# Altium PCB ESP32 PCB git.PcbDoc (part 2 of 2)
Units mil, origin at the board's own origin, x right, y up, seen from the top; angles counter-clockwise.
Board outline 2755 x 1050 mil, 4 copper layers (L1, L2, L3, L4), stack 61.583 mil thick; 64 components, 75 nets, 304 pads, 146 vias.
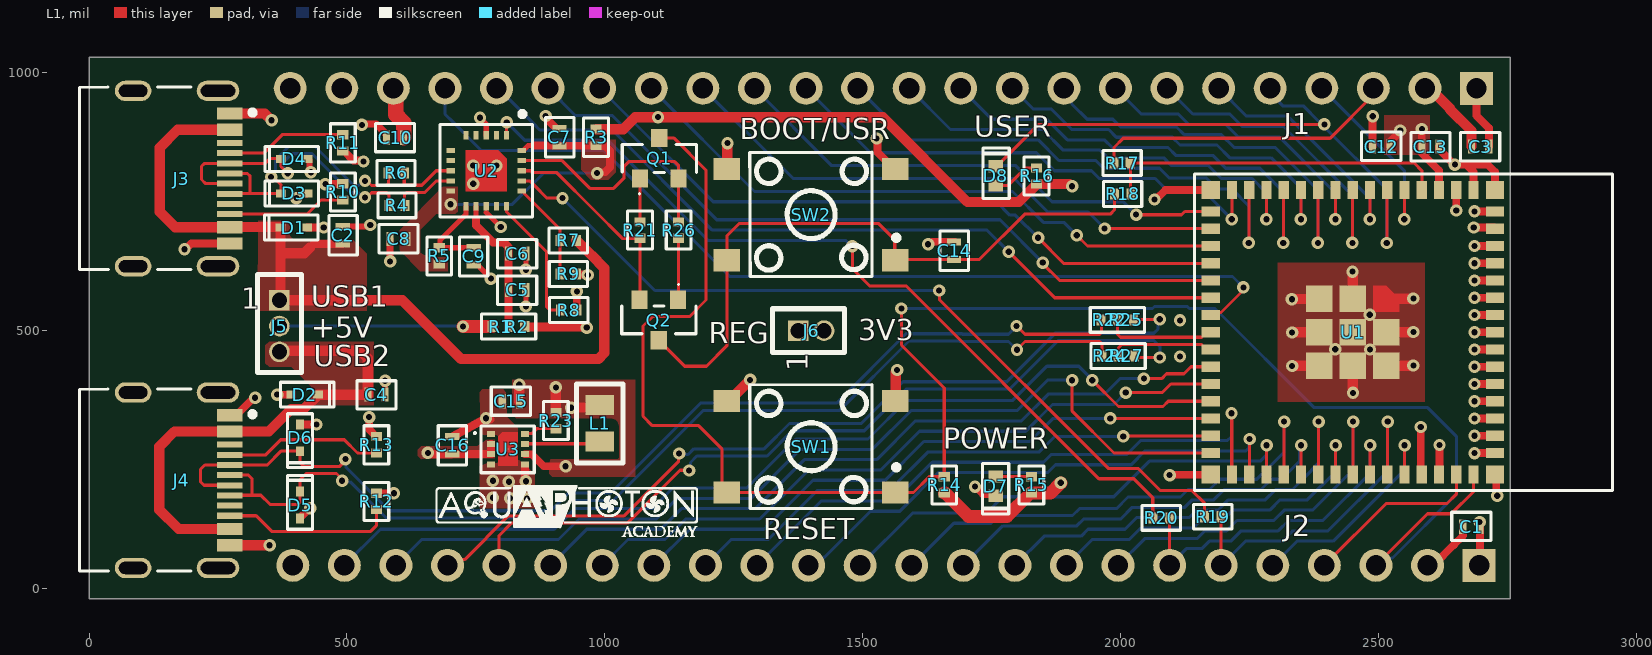
[diagram p0: L1 view]

## Via types
v1: diameter 24, hole 12, L1 to L4, tented both sides, 146 vias

## Nets (pads, with @x,y where several pads share a name; then routed paths per layer and width w, separated by ;. In a path a pad name is that pad's centre, name@x,y a point inside that pad or via, vN(x,y) a via of type N, cw(c..) or ccw(c..) an arc to the next point about the centre after c; other vN are vias at no path point) (continued)
GPIO26: (continued)
  L1 w6: v1(2010,380) 2080.73,380 2097.29,396.57 U1.26
  L4 w6: J2.18 1045,95 1116.72,95 1156.72,135 1300.15,135 1395.15,230 1535.15,230 1610.15,305 1815.78,305 1867.78,357 1987,357 v1(2010,380)
GPIO33: J2.17 U1.28 | length 1197.6
  L1 w6: v1(1980,330) 1980.18,329.82 2174.27,329.82 U1.28
  L4 w6: J2.17 1165,115 1308.43,115 1403.43,210 1543.43,210 1618.43,285 1824.06,285 1869.06,330 v1(1980,330)
GPIO34: J2.16 U1.29 | length 1083.5
  L1 w6: v1(2005,295) 2005.59,295.59 2173.86,295.59 U1.29
  L4 w6: J2.16 1245,95 1316.72,95 1411.72,190 1551.72,190 1626.72,265 1842.25,265 1872.25,295 v1(2005,295)
GPIO35: J2.15 U1.31 | length 1202.1
  L1 w6: v1(2215,340) 2215.39,339.61 2215.39,221.76 U1.31
  L4 w6: J2.15@1295,59.61 J2.15 1420,170 1560,170 1635,245 1850.53,245 1865.53,260 2012.01,260 2039.01,287 2207,287 2215,295 v1(2215,340)
GPIO36: J2.14 U1.32 | length 1034.5
  L1 w6: U1.32@2249.52,221.64 2249.63,221.74 2249.63,289.63 v1(2250,290)
  L4 w6: J2.14 1409.61,45 1425.35,60.73 1425.73,60.73 1515,150 1571.72,150 1646.72,225 1858.82,225 1873.82,240 2020.29,240 2047.29,267 2243.1,267 2248.96,272.86 2248.96,288.96 v1(2250,290)
GPIO37: J2.13 U1.33 | length 951.3
  L1 w6: U1.33 v1@2282.72,277.49
  L4 w6: J2.13 1596.64,146.64 1740.07,146.64 1771.43,178 1986.58,178 2055.58,247 2270.73,247 2282.93,259.21 v1(2282.93,277.7)
GPIO38: J2.12 U1.34 | length 973.4
  L1 w6: U1.34@2316.45,221.64 v1@2316.45,323.22
  L4 w6: J2.12 1676.64,126.64 1748.36,126.64 1763.36,141.64 1906.79,141.64 1920.15,155 1991.86,155 2014.31,177.45 2116.03,177.45 2130.58,192 2172.29,192 2192.29,212 2264.01,212 2316.93,264.92 v1(2316.93,323.7)
GPIO39: J2.11 U1.35 | length 823.7
  L1 w6: U1.35 v1@2349.65,277.49
  L4 w6: J2.11 1771.64,121.64 1915.07,121.64 1928.43,135 2000.15,135 2022.6,157.45 2124.31,157.45 2138.86,172 2180.58,172 2200.58,192 2272.29,192 2292.29,212 2312,212 2347.18,247.18 2347.18,275.03 v1(2349.86,277.7)
GPIO40: J2.10 U1.36 | length 853.4
  L1 w6: U1.36@2383.38,221.64 v1@2383.38,323.22
  L4 w6: J2.10 1851.64,101.64 1923.36,101.64 1936.72,115 1950.09,115 2008.43,115 2030.88,137.45 2132.6,137.45 2147.15,152 2188.86,152 2208.86,172 2280.58,172 2300.58,192 2333.28,192 2369.86,228.58 2369.86,229.86 2383.86,243.86 v1(2383.86,323.7)
GPIO41: J2.9 U1.37 | length 704.1
  L1 w6: U1.37 v1@2416.57,277.49
  L4 w6: J2.9 1945,95 2016.72,95 2039.17,117.45 2140.88,117.45 2155.43,132 2197.15,132 2217.15,152 2288.86,152 2308.86,172 2362,172 2416.79,226.79 v1(2416.79,277.7)
GPIO42: J2.8 U1.38 | length 727.2
  L1 w6: U1.38@2450.31,221.64 v1@2450.31,323.22
  L4 w6: J2.8 2047.45,97.45 2149.17,97.45 2163.72,112 2205.43,112 2225.43,132 2297.15,132 2317.15,152 2372,152 2450.79,230.79 v1(2450.79,323.7)
GPIO45: J2.5 U1.41 | length 435.7
  L1 w6: U1.41 v1@2550.43,277.49
  L4 w6: J2.5 2342,92 2412,92 2550.65,230.65 v1(2550.65,277.7)
GPIO46: J2.4 U1.44 | length 351.3
  L1 w6: J2.4 2515,165 2632.72,165 2650.83,183.11 U1.44
GPIO47: J2.23 U1.27 | length 1876.4
  L1 w6: v1(1945,404) 1996,353 2082.01,353 2092.11,363.1 U1.27
  L4 w6: J2.23 565,115 901.72,115 941.72,155 1091.86,155 1131.86,195 1275.29,195 1370.29,290 1510.29,290 1585.29,365 1790.93,365 1856.93,431 1919,431 1945,405 v1(1945,404)
GPIO48: J2.22 U1.30 | length 1821.8
  L1 w6: v1(1906,404) 1906,344 1987.29,262.71 U1.30
  L4 w6: J2.22 645,95 910,95 950,135 1100.15,135 1140.15,175 1283.58,175 1378.58,270 1518.58,270 1593.58,345 1799.21,345 1858.21,404 v1(1906,404)
NetC9_2: C9.2 R5.2 U2.11 | length 168.7
  L1 w10.01: U2.11@730.63,741.1 730.63,725.63 722,717 680.4,675.4 680.4,662.15 R5.2 C9.2
NetD7_2: D7.2 R15.1 | length 69.3
  L1 w6: D7.2 1758.33,217.07 1826.67,217.07 R15.1
NetD8_2: D8.2 R16.1 | length 93.3
  L1 w6: D8.2 1781.3,781.3 1815.75,815.75 R16.1
NetJ3_A5: J3.A5 R11.2 | length 234.2
  L1 w6: J3.A5 338.49,844.13 374.35,880 R11.2
NetJ3_B5: J3.B5 R10.2 | length 230.6
  L1 w6: J3.B5 422.56,726.02 449.79,753.25 R10.2
NetJ4_A5: J4.A5 R13.2 | length 307
  L1 w6: J4.A5 342.5,259.29 371.67,288.46 494.89,288.46 520.36,263 R13.2
NetJ4_B5: J4.B5 R12.2 | length 332.7
  L1 w6: J4.B5 323.82,141.18 354,111 546,111 557,122 R12.2
NetL1_1: L1.1 U3.7 | length 158.6
  L1 w6: U3.7@845.53,280.84 872,280.84 L1.1@1004.16,280.84
NetQ1_1: Q1.1 R21.1 | length 84.3
  L1 w6: R21.1 1068,794.8 Q1.1
NetQ2_1: Q2.1 R26.1 | length 119.7
  L1 w6: Q2.1 1143,561 R26.1
NetR8_1: R8.1 U2.15 | length 257.1
  L1 w6: U2.15@809.37,741.1 809.37,730.63 823,717 887,653 887,545.86 892.86,540 R8.1
NetR23_1: R23.1 U3.8 | length 64.1
  L1 w6: U3.8 845.91,300.91 858.91,300.91 868,310 R23.1
RTS_FTDI: Q1.2 R26.2 U2.19 | length 473.4
  L1 w6: U2.19@838.9,829.69 863,829.69 917.32,829.69 971,776 1017,776 1037.45,796.45 1037.45,818.93 1046.24,827.72 1135.28,827.72 1143,820 Q1.2 R26.2
RXD_FTDI: R20.2 U2.1 | length 1644.3
  L1 w6: U2.1@809.37,878.9 U2.1 809.45,903.45 v1(809.82,903.82) ; v1(1480,664) 1480,620 1513,587 1583.82,587 1957.82,213 2025.53,213 2062.27,176.27 2062.27,137.73 R20.2
  L4 w6: v1(809.82,903.82) 810.63,903 844.42,869.21 863,869.21 1005.94,869.21 1200.15,675 1467.14,675 1478.14,664 v1(1480,664)
TXD_FTDI: R19.2 U2.17 | length 1618.7
  L1 w6: U2.17@838.9,790.31 854.69,790.31 863,782 888,757 v1(918,757) ; v1(1648,578) 1648.59,577.41 1648.59,560.41 1976,233 2033.82,233 2076.82,190 2138,190 2162.88,165.12 R19.2
  L4 w6: v1(918,757) 1097,578 v1(1648,578)
U0RXD: J2.6 R19.1 U1.40 | length 690.6
  L1 w6: R19.1 2194.69,139.06 2194.69,45.31 J2.6 ; U1.40@2517.24,221.64 v1@2517.24,323.22
  L4 w6: J2.6 2242,92 2313.72,92 2333.72,112 2402,112 2517.72,227.72 v1(2517.72,323.7)
U0TXD: J2.7 R20.1 U1.39 | length 665.1
  L1 w6: R20.1 2094.75,136.75 2094.75,45.25 J2.7 ; U1.39 v1@2483.5,277.49
  L4 w6: J2.7 2127.45,77.45 2157.45,77.45 2172,92 2213.72,92 2233.72,112 2305.43,112 2325.43,132 2392,132 2483.72,223.72 v1(2483.72,277.7)
"VBUS _SENSE": R7.1 R9.2 U2.16 | length 192.8
  L1 w6: U2.16@838.9,770.63 841.08,770.63 841.77,769.94 841.77,767.76 913.25,696.28 R7.1 913.38,674.87 913.38,610.13 R9.2
pads on no net: J1.24 J3.A8 J3.B8 J4.A8 J4.B8 U2.2 U2.4 U2.5 U2.6 U2.7 U2.14

## Polygon pours and split planes (outlines as drawn)
"+3V3 FTDI" on L1 "+3V3_FTDI_L01_P008" (solid, pour order 8): 642,651.38 655.4,643 695,643 695,615 642,615 602,656 602,695 686,779 715,779 715,727 673,727 642,696
+3V3_REG on L1 "+3V3_REG_L01_P031" (solid, pour order 31): 1027.56,255.31 cw(c1023.24,255.31) 1023.24,251 1014.08,251 986.02,251 895,251 ccw(c933.99,231.82) 892,243 892,218 893,217 1059,217 1059,405 820,405 820,338 828,330 1005,330 1012.24,330 cw(c1012.24,314.69) 1027.56,314.69
GND on L1 "GND_L01_P019" (solid, pour order 19): 2305,632 2590,632 2590,362 2305,362
GND on L1 "GND_L01_P027" (solid, pour order 27): 833,249.51 864,222.3 864,156 757,156 757,237 788,249.69 788,289 759.22,300.22 757,381 762,386 803,386 808,381 810,351 810,333.03 833,310.03
+5V on L1 "+5V_L01_P017" (solid, pour order 17): 637.5,269.13 643.72,276 752,276 772.8,289 788,289 788,252.84 643.66,251.15 637.58,257.23 637.5,257.23
+5V_VBUS2 on L1 "+5V_VBUS2_L01_P020" (solid, pour order 20): 342,472 349,479 552,479 552,355 431,355 431,391 392,430 349,430 342,437
+5V_VBUS1 on L1 "+5V_VBUS1_L01_P013" (solid, pour order 13): 383,717 389,711 389,684 396.3,676.7 509.8,677.2 538,649 538,539 326.98,539 328,717
"+3V3 FTDI" on L1 "+3V3_FTDI_L01_P003" (solid, pour order 3): 1021,807 1021,870 954,870 954,807 968,793 1007,793
+3V3 on L1 "+3V3_L01_P000" (solid, pour order 0): 2599,918 2599,841 2511,841 2511,918 2516,918
+3V3 on L2 "+3V3_L02_P032" (solid, remove dead copper, pour order 32): 930,527.5 929.96,489.94 955,475 984.17,479.17 1075,570 1075,817.5 1125,867.5 1340,867.5 1405,802.5 1405,442.5 1590,257.5 1785,257.5 2035,7.5 2770,7.5 2770,150 2057.5,150 1810,397.5 1570,397.5 1460,507.5 1460,680 1510,730 1520,732.5 2060,732.5 2140,812.5 2565,812.5 2645,892.5 2645,1017.5 1116.06,1017.5 989.38,890.82 989.38,586.88
GND on L2 "GND_L02_P034" (solid, remove dead copper, pour order 34): 2745,35 2745,1025 5,1025 5,25 10,25
+3V3_REG on L2 "+3V3_REG_L02_P033" (solid, pour order 33): 805,420 1040,420 1040,240 805,240
GND on L3 (split plane): 2734.9,0.1 20.1,0.1 20.1,1009.9 2734.9,1009.9

## Silkscreen, mask and mechanical layers (free items; w line width, h text height)
Top Overlay:
  drawing of 29 lines, arcs and shapes, not listed
  text "J1" at 2316,881 h40
  text "USER" at 1716,876 h40
  text "BOOT/USR" at 1261.72,871 h40
  text "USB1" at 431,546 h40
  text "+5V" at 431,486 h40
  text "3V3" at 1491,481 h40
  text "REG" at 1201,476 h40
  text "USB2" at 436,431 h40
  text "POWER" at 1656,271 h40
  text "J2" at 2316,101 h40
  text "RESET" at 1306.7,96 h40
Bottom Overlay:
  drawing of 49 lines, arcs and shapes, not listed
  text "NC" at 405,894 h40 r90
  text "GND" at 505,894 h40 r90
  text "5V" at 614,894 h40 r90
  text "IO18" at 705,894 h40 r90
  text "IO17" at 805,894 h40 r90
  text "IO16" at 905,894 h40 r90
  text "IO15" at 1005,894 h40 r90
  text "IO14" at 1105,894 h40 r90
  text "IO13" at 1209,894 h40 r90
  text "IO12" at 1309,894 h40 r90
  text "IO11" at 1405,894 h40 r90
  text "IO10" at 1509,894 h40 r90
  text "IO9" at 1609,894 h40 r90
  text "IO8" at 1714,894 h40 r90
  text "IO7" at 1814,894 h40 r90
  text "IO6" at 1904,894 h40 r90
  text "IO5" at 2014,894 h40 r90
  text "IO4" at 2114,894 h40 r90
  text "IO3" at 2209,894 h40 r90
  text "IO2" at 2314,894 h40 r90
  text "IO1" at 2414,894 h40 r90
  text "IO0" at 2514,894 h40 r90
  text "3V3" at 2614,894 h40 r90
  text "GND" at 2719,894 h40 r90
  text "<---PIN1--->" at 2715,752 h40 r90
  text "USB-" at 709,259 h40 r90
  text "USB+" at 809,259 h40 r90
  text "GND" at 410,255 h40 r90
  text "IO47" at 510,255 h40 r90
  text "IO48" at 610,255 h40 r90
  text "IO21" at 910,255 h40 r90
  text "IO26" at 1010,255 h40 r90
  text "IO33" at 1110,255 h40 r90
  text "IO34" at 1210,255 h40 r90
  text "IO35" at 1310,255 h40 r90
  text "IO36" at 1410,255 h40 r90
  text "IO37" at 1510,255 h40 r90
  text "IO38" at 1610,255 h40 r90
  text "IO39" at 1710,255 h40 r90
  text "IO40" at 1810,255 h40 r90
  text "IO41" at 1910,255 h40 r90
  text "IO42" at 2010,255 h40 r90
  text "TXD" at 2110,255 h40 r90
  text "RXD" at 2210,255 h40 r90
  text "IO45" at 2310,255 h40 r90
  text "IO46" at 2410,255 h40 r90
  text "EN" at 2510,255 h40 r90
  text "GND" at 2610,255 h40 r90
  text "3V3" at 2710,255 h40 r90
Board Shape:
  lines w20: 0,0 0,1015 2775,1015 2775,0 0,0

## Text inside footprints (layer, text, board x,y; h text height)
J5: Top Overlay "1" at 295,543 h40
J6: Top Overlay "1" at 1393,421 h40 r90